# Altium PCB ControlBoard.PcbDoc (part 1 of 2)
Units mil, origin at the board's own origin, x right, y up, seen from the top; angles counter-clockwise.
Board outline 3834.27 x 1968.5 mil, 4 copper layers (TOP, GND, POWER, BOTTOM), stack 23.756 mil thick; 135 components, 144 nets, 798 pads, 277 vias.
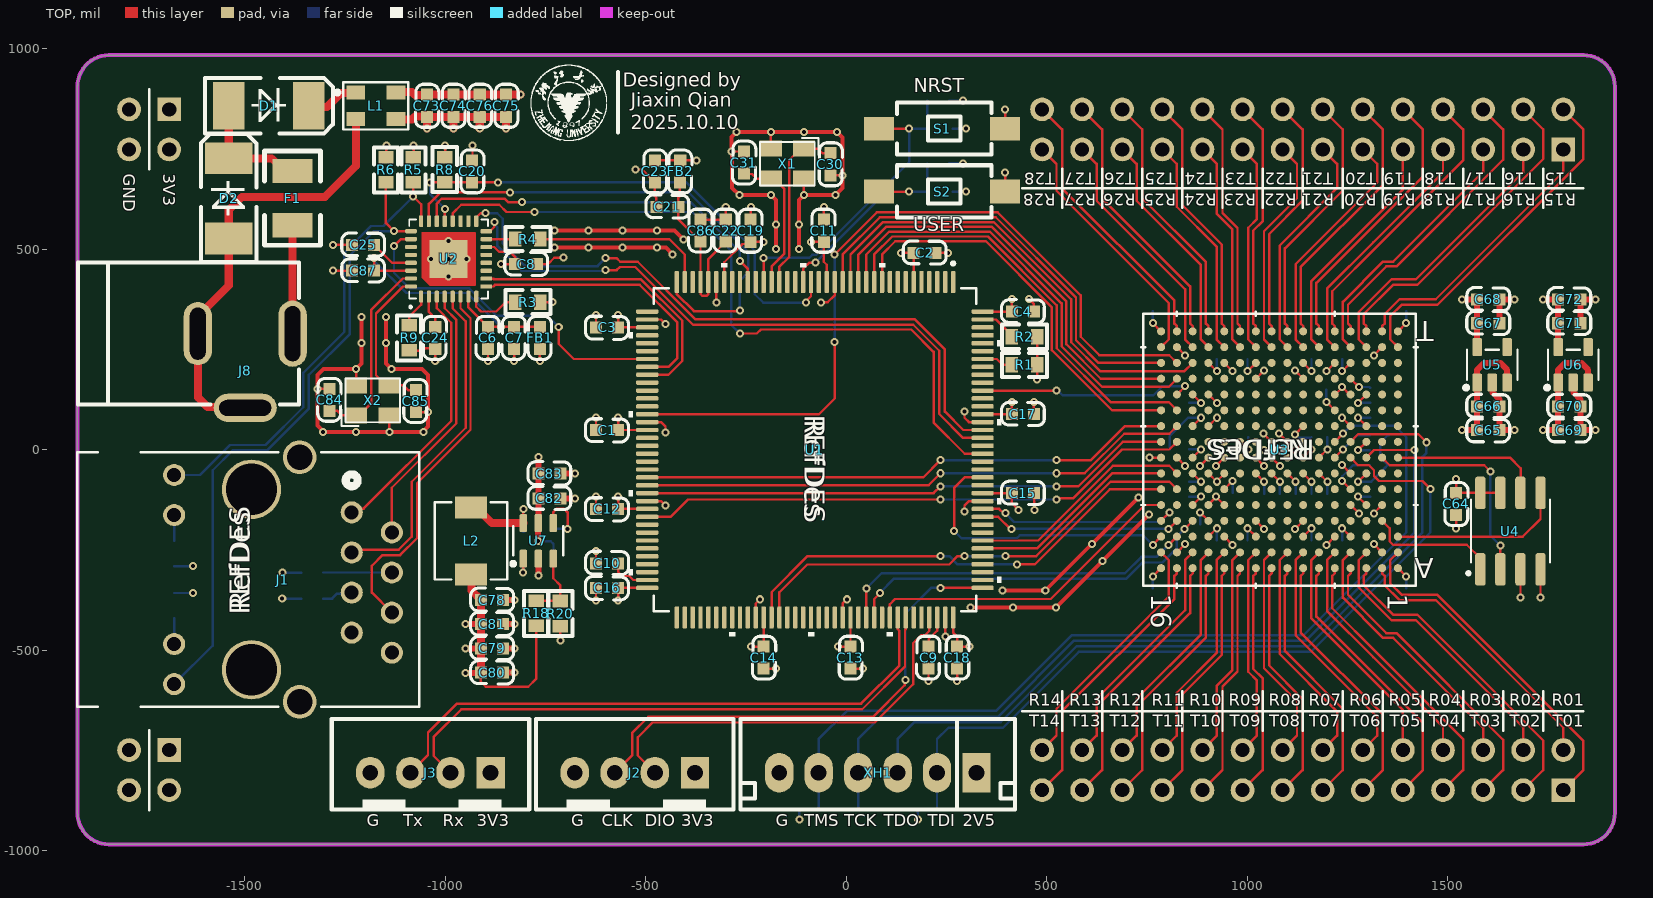
[diagram p0: TOP view]
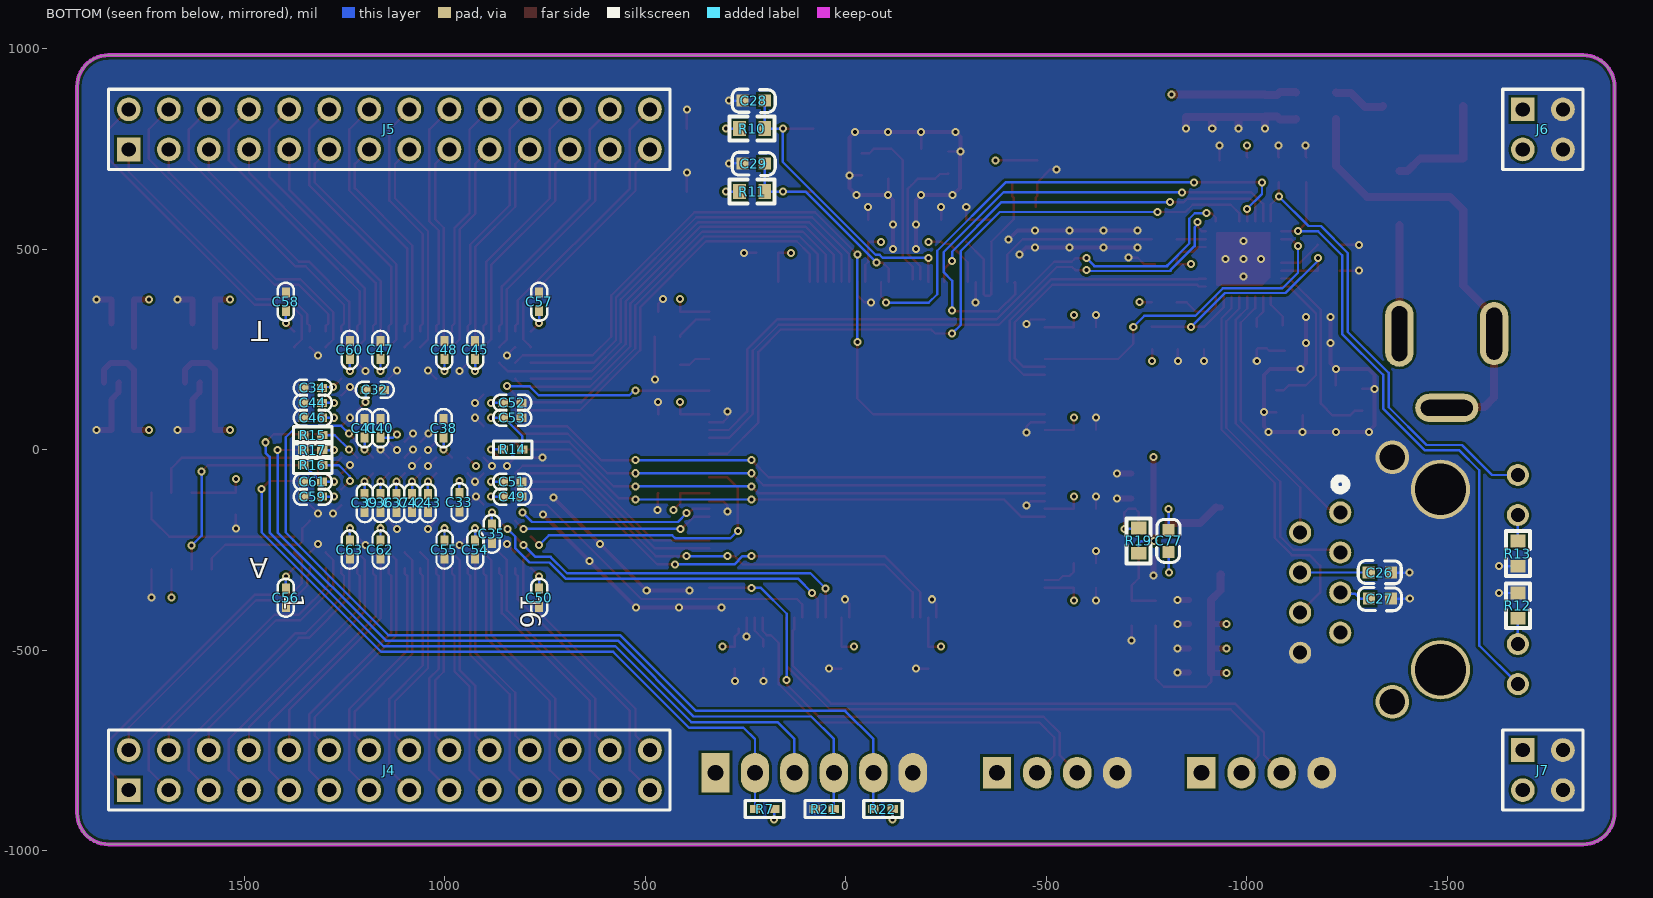
[diagram p1: BOTTOM view, seen from below]
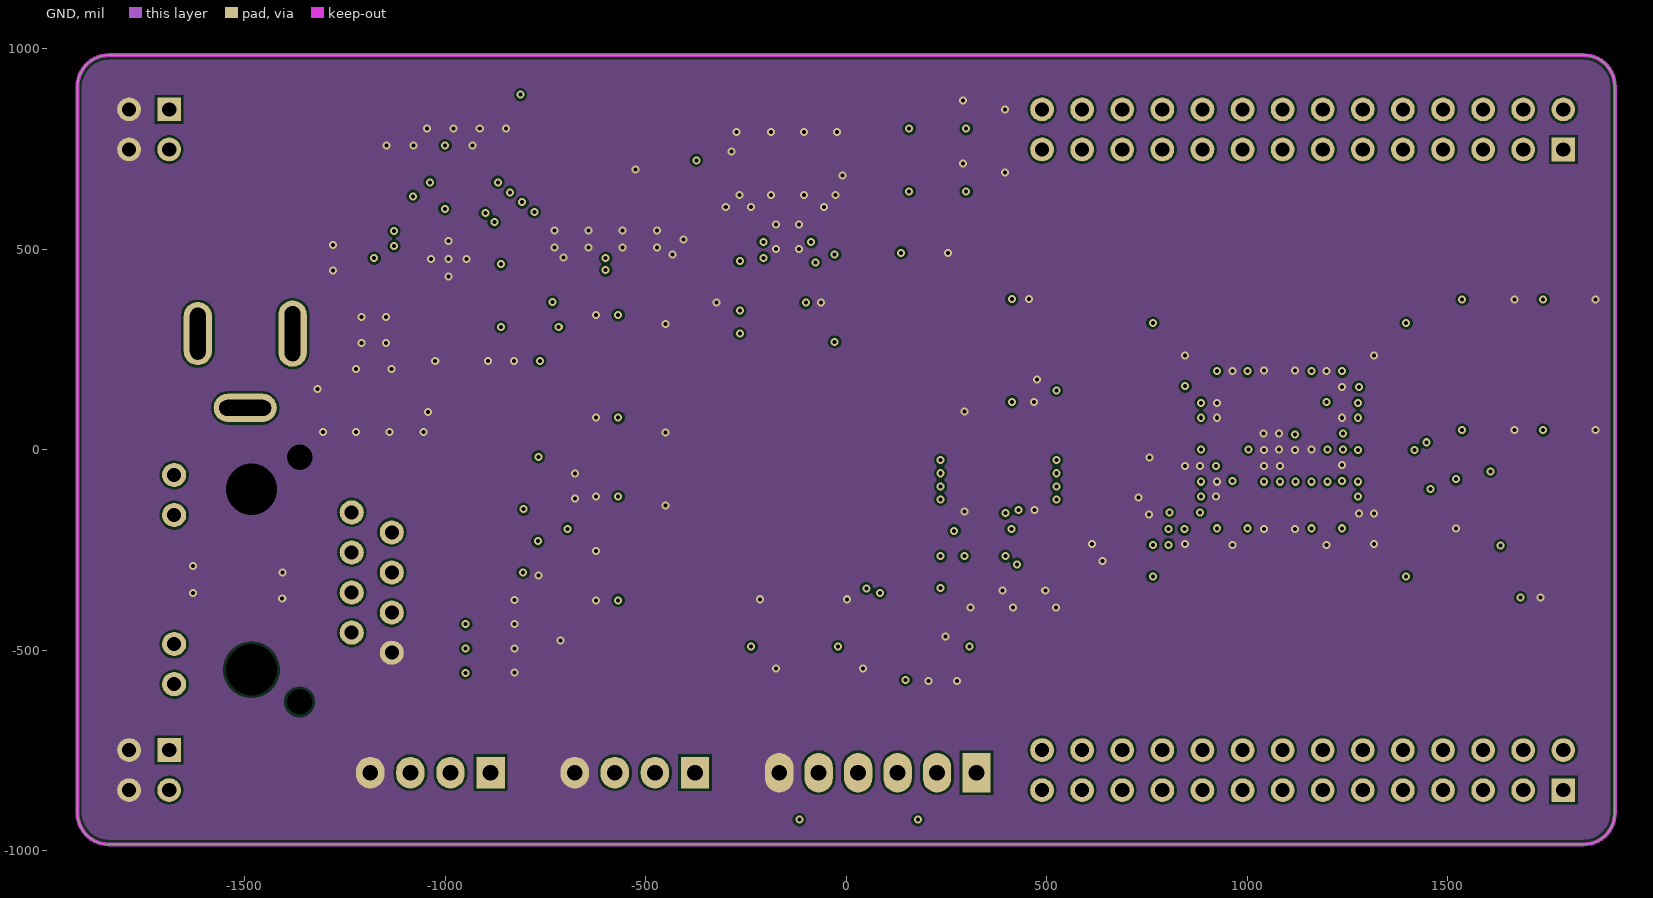
[diagram p2: GND]
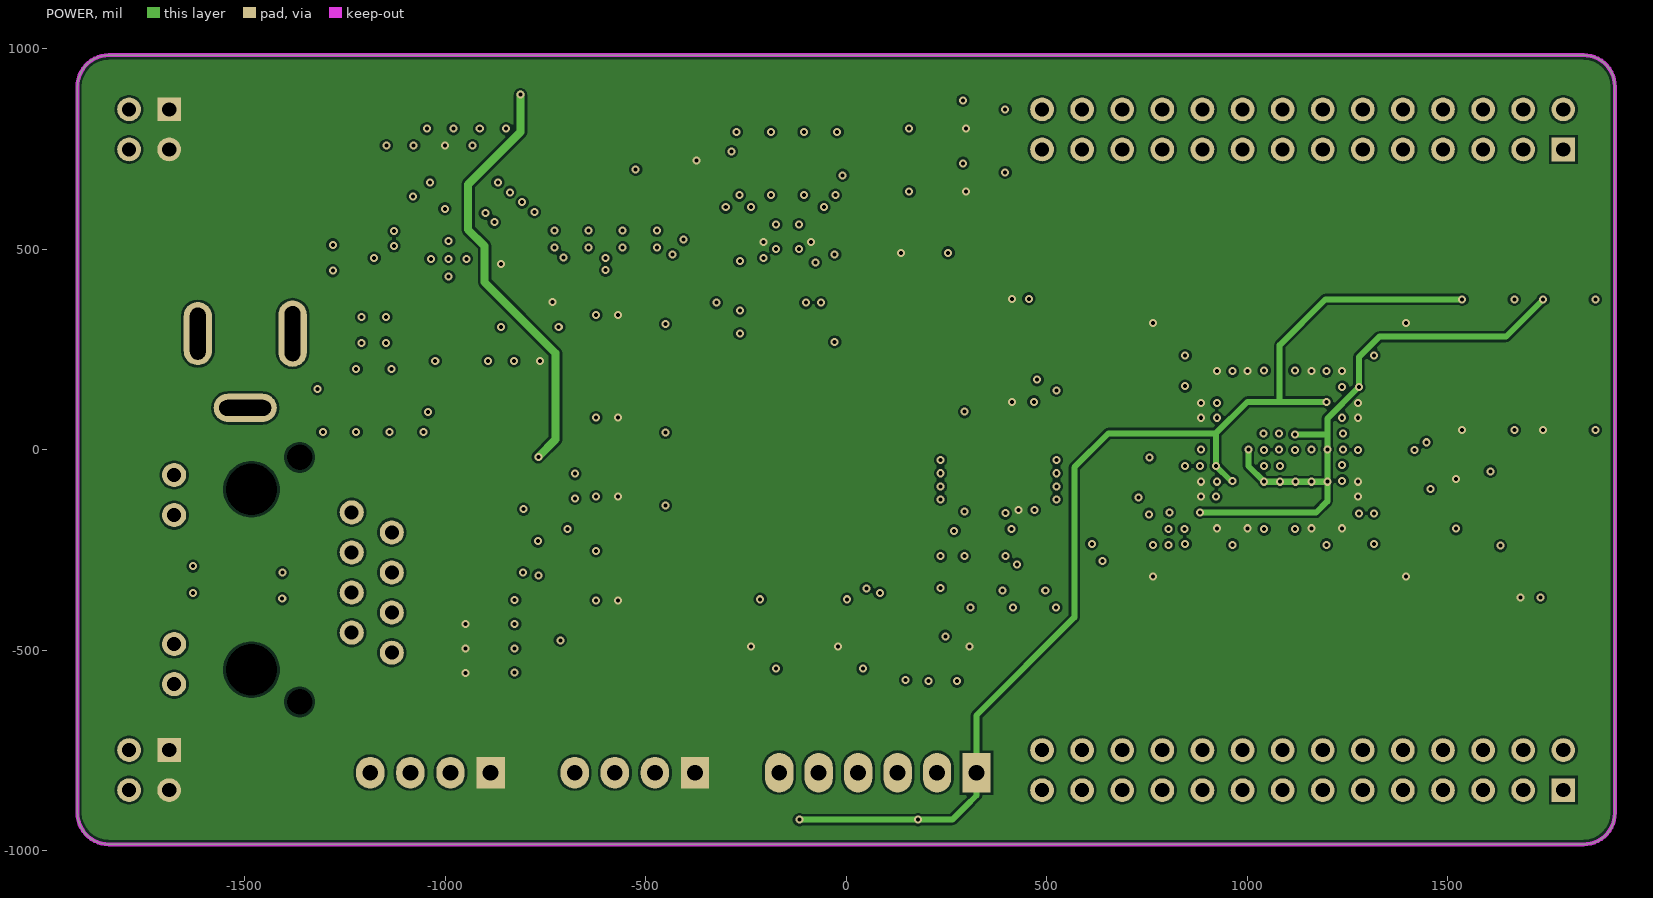
[diagram p3: POWER]

## Layer stack, top to bottom
Top Solder: solder mask 0.4, Solder Resist, Dk 3.5
TOP: signal copper 1.4
Dielectric 2: prepreg 2.8, PP-006, Dk 4.1
GND: signal copper 1.378
Dielectric 1: dielectric 12.6, FR-4, Dk 4.8
POWER: signal copper 1.378
Dielectric 3: prepreg 2.8, PP-006, Dk 4.1
BOTTOM: signal copper 1.4
Bottom Solder: solder mask 0.4, Solder Resist, Dk 3.5

## Board outline
-1838.4,-984.25 cw(c-1838.4,-905.51) -1917.14,-905.51 -1917.14,905.51 cw(c-1838.4,905.51) -1838.4,984.25 1838.4,984.25 cw(c1838.4,905.51) 1917.14,905.51 1917.14,-905.51 cw(c1838.4,-905.51) 1838.4,-984.25

## Design rules (kind name [scope] priority, off if disabled: settings)
Clearance [All] p1: gap=6 ignorepadtopadclearanceinfootprint=FALSE
DiffPairsRouting [All] p1: maxlimit=10 minlimit=8 mostfreqgap=8 toplayer_minwidth=6 toplayer_maxwidth=6 toplayer_prefwidth=6 midlayer1_minwidth=6 midlayer1_maxwidth=6 midlayer1_prefwidth=6 midlayer2_minwidth=6 midlayer2_maxwidth=6 midlayer2_prefwidth=6 bottomlayer_minwidth=6 bottomlayer_maxwidth=6 bottomlayer_prefwidth=6 maxuncoupledlength=500
PolygonConnect [All] p1: connectstyle=Direct reliefconductorwidth=10 reliefentries=4 polygonreliefangle="90 Angle" airgapwidth=10
RoutingVias [All] p1: holewidth=28 width=50 viastyle="Through Hole" minholewidth=28 minwidth=50 maxholewidth=28 maxwidth=50
SilkToSolderMaskClearance [IsPad] p1: minsilkscreentomaskgap=6 clearancetoexposedcopper=TRUE
SolderMaskExpansion [All] p1: expansion=4 istentingtop=FALSE
SupplyNets "Schematic Supply Nets_5" [InNet('3V3')] p1: voltage=0.000
SupplyNets "Schematic Supply Nets_4" [InNet('GND')] p2: voltage=0.000
SupplyNets "Schematic Supply Nets_3" [InNet('A3V3')] p3: voltage=0.000
SupplyNets "Schematic Supply Nets_2" [InNet('2V5')] p4: voltage=0.000
SupplyNets "Schematic Supply Nets_1" [InNet('12V')] p5: voltage=0.000
SupplyNets "Schematic Supply Nets" [InNet('1V2')] p6: voltage=0.000
Width [All] p1: maxlimit=20 minlimit=6 preferedwidth=6
28 further rules are at their usual default settings.

## Classes and differential pairs
net class FPGA_FSMC_DATA[7..0]: FPGA_FSMC_DATA0 FPGA_FSMC_DATA1 FPGA_FSMC_DATA2 FPGA_FSMC_DATA3 FPGA_FSMC_DATA4 FPGA_FSMC_DATA5 FPGA_FSMC_DATA6 FPGA_FSMC_DATA7
net class FPGA_FSMC_ADDR[6..0]: FPGA_FSMC_ADDR0 FPGA_FSMC_ADDR1 FPGA_FSMC_ADDR2 FPGA_FSMC_ADDR3 FPGA_FSMC_ADDR4 FPGA_FSMC_ADDR5 FPGA_FSMC_ADDR6
component class POWER: C73 C74 C75 C76 C77 C78 C79 C80 C81 C82 C83 D1 D2 F1 J8 L1 L2 R18 R19 R20 U7
component class MCU: C1 C2 C3 C4 C6 C7 C8 C9 C10 C11 C12 C13 C14 C15 C16 C17 C18 C19 C20 C21 C22 C23 C24 C25 C26 C27 C28 C29 C30 C31 C84 C85 C86 C87 FB1 FB2 J1 J2 J3 R1 R2 R3 R4 R5 R6 R8 R9 R10 R11 R12 R13 S1 S2 U1 U2 X1 X2
component class FPGA: C32 C33 C34 C35 C36 C37 C38 C39 C40 C41 C42 C43 C44 C45 C46 C47 C48 C49 C50 C51 C52 C53 C54 C55 C56 C57 C58 C59 C60 C61 C62 C63 C64 C65 C66 C67 C68 C69 C70 C71 C72 J4 J5 J6 J7 R7 R14 R15 R16 R17 R21 R22 U3 U4 U5 U6 XH1

## Components (designator, comment, footprint, x,y, rotation, side; value= is the part's Value field where it differs from the comment)
C1 "100nF/100V" 0603C -624.08,49.57 r0 top
C2 "100nF/100V" 0603C 223.41,490.65 r180 top
C3 "100nF/100V" 0603C -624.08,305.47 r0 top
C4 "100nF/100V" 0603C 468.35,344.13 r180 top
C6 "100nF/100V" 0603C -893.04,306.47 r270 top
C7 "10uF/25V" 0603C -827.9,306.47 r270 top
C8 "100nF/100V" 0603C -770.34,462.59 r180 top
C9 "2.2uF/50V" 0603C 205.63,-490.85 r270 top
C10 "2.2uF/50V" 0603C -568.71,-283.5 r180 top
C11 "100nF/100V" 0603C -55.51,573.86 r270 top
C12 "100nF/100V" 0603C -624.08,-147.28 r0 top
C13 "100nF/100V" 0603C 10.37,-546.21 r90 top
C14 "100nF/100V" 0603C -206.17,-546.21 r90 top
C15 "100nF/100V" 0603C 468.35,-108.62 r180 top
C16 "100nF/100V" 0603C -624.08,-344.13 r0 top
C17 "100nF/100V" 0603C 468.35,88.23 r180 top
C18 "100nF/100V" 0603C 276.27,-546.21 r90 top
C19 "100nF/100V" 0603C -237.86,573.86 r270 top
C20 "100nF/100V" 0603C -933.22,666.54 r90 top
C21 "10uF/25V" 0603C -418.41,605.5 r180 top
C22 "100nF/100V" 0603C -300.01,574.07 r270 top
C23 "100nF/100V" 0603C -477.69,666.54 r90 top
C24 "100nF/100V" 0603C -1024.51,306.47 r270 top
C25 "100nF/100V" 0603C -1176.93,510.59 r180 top
C26 "100nF/100V" 0603C -1359.37,-306.5 r0 bottom
C27 "100nF/100V" 0603C -1304.22,-371.14 r180 bottom
C28 "100nF/100V" 0603C 257.35,871.21 r180 bottom
C29 "100nF/100V" 0603C 257.35,714.21 r180 bottom
C30 "16pF/50V" 0603C -39.69,684.27 r90 top
C31 "16pF/50V" 0603C -255.58,688.54 r90 top
C32 "100nF/50V" 0402C 1149.73,149.32 r0 bottom
C33 "100nF/50V" 0402C 963.46,-155.69 r90 bottom
C34 "100nF/50V" 0402C 1354.47,154.16 r180 bottom
C35 "100nF/50V" 0402C 882.61,-234.43 r90 bottom
C36 "100nF/50V" 0402C 1160.31,-157.8 r90 bottom
C37 "100nF/50V" 0402C 1120.94,-157.8 r90 bottom
C38 "100nF/50V" 0402C 1003.14,79.05 r270 bottom
C39 "100nF/50V" 0402C 1199.68,-157.8 r90 bottom
C40 "100nF/50V" 0402C 1160.62,79.05 r270 bottom
C41 "100nF/50V" 0402C 1199.99,79.05 r270 bottom
C42 "100nF/50V" 0402C 1081.57,-157.8 r90 bottom
C43 "100nF/50V" 0402C 1042.2,-157.8 r90 bottom
C44 "100nF/50V" 0402C 1354.47,116.9 r180 bottom
C45 "100nF/50V" 0402C 924.4,273.8 r270 bottom
C46 "100nF/50V" 0402C 1354.47,79.64 r180 bottom
C47 "100nF/50V" 0402C 1160.62,273.8 r270 bottom
C48 "100nF/50V" 0402C 1001.03,273.8 r270 bottom
C49 "100nF/50V" 0402C 806.88,-116.9 r0 bottom
C50 "100nF/50V" 0402C 764.5,-394.02 r90 bottom
C51 "100nF/50V" 0402C 806.88,-79.64 r0 bottom
C52 "100nF/50V" 0402C 806.88,117.21 r0 bottom
C53 "100nF/50V" 0402C 806.88,79.95 r0 bottom
C54 "100nF/50V" 0402C 924.09,-273.8 r90 bottom
C55 "100nF/50V" 0402C 1000.72,-273.8 r90 bottom
C56 "100nF/50V" 0402C 1396.53,-394.02 r90 bottom
C57 "100nF/50V" 0402C 764.81,394.02 r270 bottom
C58 "100nF/50V" 0402C 1396.85,394.02 r270 bottom
C59 "100nF/50V" 0402C 1354.47,-117.21 r180 bottom
C60 "100nF/50V" 0402C 1237.25,273.8 r270 bottom
C61 "100nF/50V" 0402C 1354.47,-79.95 r180 bottom
C62 "100nF/50V" 0402C 1160.31,-273.8 r90 bottom
C63 "100nF/50V" 0402C 1236.94,-273.8 r90 bottom
C64 "100nF/100V" 0603C 1520.65,-162.82 r90 top
C65 "10uF/25V" 0603C 1573.52,49.31 r0 top
C66 "100nF/100V" 0603C 1628.95,107.91 r180 top
C67 "100nF/100V" 0603C 1628.95,315.1 r180 top
C68 "1uF/50V" 0603C 1628.95,374.41 r180 top
C69 "10uF/25V" 0603C 1775.52,49.31 r0 top
C70 "100nF/100V" 0603C 1830.95,107.91 r180 top
C71 "100nF/100V" 0603C 1830.95,315.1 r180 top
C72 "1uF/50V" 0603C 1830.95,374.41 r180 top
C73 "10uF/25V" 0603C -1046.22,830.18 r90 top
C74 "10uF/25V" 0603C -980.22,830.18 r90 top
C75 "10uF/25V" 0603C -848.22,830.18 r90 top
C76 "10uF/25V" 0603C -914.22,830.18 r90 top
C77 "100nF/100V" 0603C -805.62,-199.61 r270 bottom
C78 "100nF/100V" 0603C -855.32,-375.13 r180 top
C79 "10uF/25V" 0603C -855.32,-495.87 r180 top
C80 "10uF/25V" 0603C -855.32,-556.24 r180 top
C81 "10uF/25V" 0603C -855.32,-435.5 r180 top
C82 "100nF/100V" 0603C -712.65,-121.65 r180 top
C83 "10uF/25V" 0603C -712.65,-59.94 r180 top
C84 "16pF/50V" 0603C -1287.73,152.27 r270 top
C85 "16pF/50V" 0603C -1072.87,149.04 r270 top
C86 "100nF/100V" 0603C -362.51,574.07 r270 top
C87 "100nF/100V" 0603C -1176.93,446.17 r180 top
D1 "SSA34" SMA/DO-214AC -1534.86,857.86 r0 top
D2 "SMAJ12CA" SMA/DO-214AC -1539.86,531.89 r90 top
F1 "JK-SMD1210-050-30V" FUSE-1210 -1378.64,561.86 r90 top
FB1 "200R,1A" 0603 -762.77,306.47 r270 top
FB2 "200R,1A" 0603 -415.19,666.54 r90 top
J1 "RJ45" 1105A_HAN -1233.15,-156.14 r90 top
J2 "XH4" XH4/2.54mm/180 -377,-805.28 r180 top
J3 "XH4" XH4/2.54mm/180 -886.86,-805.28 r180 top
J4 "Pin HDR2X14" "Pin HDR2X14/2.54mm-S" 1788.4,-848.86 r180 bottom
J5 "Pin HDR2X14" "Pin HDR2X14/2.54mm-S" 1788.4,748.86 r180 bottom
J6 "Pin HDR2X2" "Pin HDR2X2/2.54mm-S" -1688.4,848.86 r270 bottom
J7 "Pin HDR2X2" "Pin HDR2X2/2.54mm-S" -1688.4,-748.86 r270 bottom
J8 "DC-005-5A-2.0" DC-IN-TH_DC-005-5A-2.0 -1498.75,197 r0 top
L1 "SMW3225S102HTE" INDDFN4_320X250X240L65X80N -1172.86,857.86 r0 top value=10uH
L2 "4.7uH" L0420 -935.49,-227.29 r270 top value=10uH
R1 "4.7kR, 1%" 0603R 476.13,211.86 r180 top
R2 "4.7kR, 1%" 0603R 476.13,281.86 r180 top
R3 "4.7kR, 1%" 0603R -762.56,367.95 r180 top
R4 "22R, 1%" 0603R -762.56,525.27 r180 top
R5 "4.7kR, 1%" 0603R -1079.51,666.75 r90 top
R6 "4.7kR, 1%" 0603R -1147.83,666.75 r90 top
R7 "2kR, 1%" 0402R 178.56,-896 r0 bottom
R8 "4.7kR, 1%" 0603R -1001.19,729.74 r270 top
R9 "2.49kR, 1%" 0603R -1089.86,247.79 r90 top
R10 "10kR, 1%" 0603R 265.13,800.86 r180 bottom
R11 "10kR, 1%" 0603R 265.13,643.86 r180 bottom
R12 "510R, 1%" 0603R -1676.07,-420.14 r90 bottom
R13 "510R, 1%" 0603R -1676.07,-227.42 r270 bottom
R14 "10kR, 1%" 0402R 806.88,1.05 r0 bottom
R15 "10kR, 1%" 0402R 1353.47,36.2 r180 bottom
R16 "10kR, 1%" 0402R 1353.47,-38.31 r180 bottom
R17 "10kR, 1%" 0402R 1353.47,-1.06 r180 bottom
R18 "100kR, 1%" 0603R -773.23,-439.14 r90 top
R19 "100kR, 1%" 0603R -730.46,-258.29 r90 bottom
R20 "22kR, 1%" 0603R -712.86,-377.14 r270 top
R21 "2kR, 1%" 0402R 77.71,-896 r180 bottom
R22 "2kR, 1%" 0402R -116.71,-896 r0 bottom
S1 "Key" SW-SMD 239.14,800.86 r180 top
S2 "Key" SW-SMD 239.14,643.86 r180 top
U1 "STM32F407ZET6" LQFP144-20X20MM -77.86,0 r270 top locked
U2 "YT8512C" QFN32 -991.34,476.06 r0 top
U3 "EP4CE10F17C8N" FBGA256 1080.67,0 r180 top locked
U4 "W25Q16JVSNIQ" SOIC8 1656.61,-203 r0 top
U5 "TPRT9013-25GB" SOT23-5 1611.14,211.86 r0 top
U6 "TPRT9013-12GB" SOT23-5 1813.14,211.86 r0 top
U7 "FDK1620YSOT236G/TR" SOT23-6 -767.86,-227.29 r0 top
X1 "X322525MOB4SI" SMD3225-4 -146.76,713.6 r180 top
X2 "X322525MOB4SI" SMD3225-4 -1180.66,122.95 r0 top
XH1 "XH6" XH6/2.54mm/180 324.99,-805.28 r180 top

## Footprints (in the part's own frame and the unit in brackets; to place one, negate y for a bottom-side part, rotate by r counter-clockwise, add the part's x,y. Pads: shape width x height; smd on the part's side, far side on the other; paste and mask are expansions set on the pad)
0402C [mil]
  rect 25x20 smd: 1(2,0.16) 2(48,0.16)
  silkscreen extent -23,-20 73,20, body extent 5,-12 45,12, height 8
0402R [mil]
  rect 26x20 smd: 1(0,0) 2(48,0)
  silkscreen extent -24,-21 72,21, body extent 4,-10 43,10, height 13
0603 [mil]
  rect 30x30 smd: 1(0.21,-0.35) 2(55.21,-1.35)
  silkscreen extent -26,-30 81,28, body extent -1,-15 62,17, height 12
0603C [mil]
  rect 30x30 smd: 1(0.21,-0.35) 2(55.21,-0.35)
  silkscreen extent -26,-30 81,28, body extent -1,-16 61,15, height 12
0603R [mm]
  rect 0.8x0.965 smd: 1(0,0) 2(1.6,0)
  silkscreen extent -0.63,-0.76 2.21,0.76, body extent -0.04,-0.41 1.56,0.41, height 0.45
1105A_HAN [mil]
  round 55 / inner round 60 / far side round 55 hole 35 paste-99999 mask+0: 1(0,0) 2(-50,-100) 3(-100,0) 4(-150,-100) 5(-200,0) 6(-250,-100) 7(-300,0) 8(-350,-100) 9(93.19,442.91) 10(-6.81,442.91) 11(-328.46,442.91) 12(-428.46,442.91)
  round 84 / inner round 60 / far side round 84 hole 64 paste-99999: 13(137.28,129.92) 16(-472.56,129.92)
  round 148 / inner round 60 / far side round 148 hole 128 paste-99999: 14(57.36,250) 15(-392.64,250)
  silkscreen extent -485,-168 150,685, body extent -484,-169 146,682, height 549
DC-IN-TH_DC-005-5A-2.0 [mm]
  oval 1.8x4.2 hole 1 slot 3.5 at 90 deg: 1(3,2.352)
  oval 1.8x4 hole 1 slot 3.3 at 90 deg: 2(-3,2.352)
  oval 4x1.8 hole 1 slot 3.3 at 0 deg: 3(0,-2.352)
  silkscreen extent -10.6,-2.15 3.4,6.85, body extent -10.7,-2.54 3.3,6.86, height 11.1
FBGA256 [mil]
  round 20 smd paste+0 mask+0: A1(-295.28,295.28) A2(-255.91,295.28) A3(-216.54,295.28) A4(-177.17,295.28) A5(-137.8,295.28) A6(-98.43,295.28) A7(-59.06,295.28) A8(-19.69,295.28) A9(19.68,295.28) A10(59.06,295.28) A11(98.43,295.28) A12(137.8,295.28) A13(177.17,295.28) A14(216.54,295.28) A15(255.91,295.28) A16(295.28,295.28) B1(-295.28,255.91) B2(-255.91,255.91) B3(-216.54,255.91) B4(-177.17,255.91) B5(-137.8,255.91) B6(-98.43,255.91) B7(-59.06,255.91) B8(-19.69,255.91) B9(19.68,255.91) B10(59.05,255.91) B11(98.43,255.91) B12(137.8,255.91) B13(177.17,255.91) B14(216.54,255.91) B15(255.91,255.91) B16(295.28,255.91) C1(-295.28,216.54) C2(-255.91,216.54) C3(-216.54,216.54) C4(-177.17,216.54) C5(-137.8,216.54) C6(-98.43,216.54) C7(-59.06,216.54) C8(-19.69,216.54) C9(19.68,216.54) C10(59.05,216.54) C11(98.43,216.54) C12(137.8,216.54) C13(177.17,216.54) C14(216.54,216.54) C15(255.91,216.54) C16(295.28,216.54) D1(-295.28,177.17) D2(-255.91,177.17) D3(-216.54,177.17) D4(-177.17,177.17) D5(-137.8,177.17) D6(-98.43,177.17) D7(-59.06,177.17) D8(-19.68,177.17) D9(19.69,177.17) D10(59.06,177.17) D11(98.43,177.17) D12(137.8,177.17) D13(177.17,177.17) D14(216.54,177.17) D15(255.91,177.17) D16(295.28,177.17) E1(-295.28,137.8) E2(-255.91,137.8) E3(-216.54,137.8) E4(-177.17,137.8) E5(-137.8,137.8) E6(-98.43,137.8) E7(-59.06,137.8) E8(-19.69,137.8) E9(19.68,137.8) E10(59.06,137.8) E11(98.43,137.8) E12(137.8,137.8) E13(177.17,137.8) E14(216.54,137.8) E15(255.91,137.8) E16(295.28,137.8) F1(-295.28,98.43) F2(-255.91,98.43) F3(-216.54,98.43) F4(-177.17,98.43) F5(-137.8,98.43) F6(-98.43,98.43) F7(-59.06,98.43) F8(-19.69,98.43) F9(19.68,98.43) F10(59.06,98.43) F11(98.43,98.43) F12(137.8,98.43) F13(177.17,98.43) F14(216.54,98.43) F15(255.91,98.43) F16(295.28,98.43) G1(-295.28,59.06) G2(-255.91,59.06) G3(-216.54,59.06) G4(-177.17,59.06) G5(-137.8,59.06) G6(-98.43,59.06) G7(-59.06,59.06) G8(-19.68,59.06) G9(19.68,59.06) G10(59.06,59.06) G11(98.43,59.06) G12(137.8,59.06) G13(177.17,59.06) G14(216.54,59.06) G15(255.91,59.06) G16(295.28,59.06) H1(-295.28,19.69) H2(-255.91,19.69) H3(-216.54,19.69) H4(-177.17,19.69) H5(-137.8,19.69) H6(-98.43,19.69) H7(-59.06,19.69) H8(-19.69,19.69) H9(19.68,19.69) H10(59.06,19.69) H11(98.43,19.69) H12(137.8,19.69) H13(177.17,19.69) H14(216.54,19.69) H15(255.91,19.69) H16(295.28,19.69) J1(-295.28,-19.68) J2(-255.91,-19.68) J3(-216.54,-19.69) J4(-177.17,-19.68) J5(-137.8,-19.68) J6(-98.43,-19.69) J7(-59.06,-19.68) J8(-19.69,-19.68) J9(19.68,-19.68) J10(59.05,-19.68) J11(98.43,-19.68) J12(137.8,-19.68) J13(177.17,-19.68) J14(216.54,-19.68) J15(255.91,-19.68) J16(295.28,-19.69) K1(-295.28,-59.06) K2(-255.91,-59.06) K3(-216.54,-59.06) K4(-177.17,-59.06) K5(-137.8,-59.06) K6(-98.43,-59.06) K7(-59.06,-59.06) K8(-19.69,-59.06) K9(19.68,-59.06) K10(59.06,-59.06) K11(98.43,-59.06) K12(137.8,-59.06) K13(177.17,-59.06) K14(216.54,-59.06) K15(255.91,-59.06) K16(295.28,-59.06) L1(-295.28,-98.43) L2(-255.91,-98.43) L3(-216.54,-98.43) L4(-177.17,-98.43) L5(-137.8,-98.43) L6(-98.43,-98.43) L7(-59.06,-98.43) L8(-19.69,-98.43) L9(19.68,-98.43) L10(59.06,-98.43) L11(98.43,-98.43) L12(137.8,-98.43) L13(177.17,-98.43) L14(216.54,-98.43) L15(255.91,-98.43) L16(295.28,-98.43) M1(-295.28,-137.8) M2(-255.91,-137.8) M3(-216.54,-137.8) M4(-177.17,-137.8) M5(-137.8,-137.8) M6(-98.43,-137.8) M7(-59.06,-137.8) M8(-19.69,-137.8) M9(19.68,-137.8) M10(59.05,-137.8) M11(98.43,-137.8) M12(137.8,-137.8) M13(177.17,-137.8) M14(216.54,-137.8) M15(255.91,-137.8) M16(295.28,-137.8) N1(-295.28,-177.17) N2(-255.91,-177.17) N3(-216.54,-177.17) N4(-177.17,-177.17) N5(-137.8,-177.17) N6(-98.43,-177.17) N7(-59.06,-177.17) N8(-19.69,-177.17) N9(19.68,-177.17) N10(59.05,-177.17) N11(98.43,-177.17) N12(137.8,-177.17) N13(177.17,-177.17) N14(216.54,-177.17) N15(255.91,-177.17) N16(295.28,-177.17) P1(-295.28,-216.54) P2(-255.91,-216.54) P3(-216.54,-216.54) P4(-177.17,-216.54) P5(-137.8,-216.54) P6(-98.43,-216.54) P7(-59.06,-216.54) P8(-19.69,-216.54) P9(19.69,-216.54) P10(59.06,-216.54) P11(98.43,-216.54) P12(137.8,-216.54) P13(177.17,-216.54) P14(216.54,-216.54) P15(255.91,-216.54) P16(295.28,-216.54) R1(-295.28,-255.91) R2(-255.91,-255.91) R3(-216.54,-255.91) R4(-177.17,-255.91) R5(-137.8,-255.91) R6(-98.43,-255.91) R7(-59.06,-255.91) R8(-19.69,-255.91) R9(19.68,-255.91) R10(59.06,-255.91) R11(98.43,-255.91) R12(137.8,-255.91) R13(177.17,-255.91) R14(216.54,-255.91) R15(255.91,-255.91) R16(295.28,-255.91) T1(-295.28,-295.28) T2(-255.91,-295.28) T3(-216.54,-295.28) T4(-177.17,-295.28) T5(-137.8,-295.28) T6(-98.43,-295.28) T7(-59.06,-295.28) T8(-19.69,-295.28) T9(19.68,-295.28) T10(59.05,-295.28) T11(98.43,-295.28) T12(137.8,-295.28) T13(177.17,-295.28) T14(216.54,-295.28) T15(255.91,-295.28) T16(295.28,-295.28)
  silkscreen extent -344,-344 345,344, body extent -334,-334 334,334, height 61
FUSE-1210 [mil]
  rect 60x100 smd: 1(-2,2) 2(133,2)
  silkscreen extent -52,-68 183,72, body extent 8,-49 134,53, height 27
INDDFN4_320X250X240L65X80N [mm] "Inductor, Dual Flat No-Lead (DFN) 4 pins, 2.55 mm pitch; 3.20 mm L X 2.50 mm W X 2.40 mm H body"
  rect 1.2x0.87 smd: 1(-1.275,0.841) 2(-1.275,-0.841) 3(1.275,-0.841) 4(1.275,0.841)
  silkscreen extent -2.56,-1.5 2.06,1.5, body extent -1.6,-1.25 1.6,1.25, height 2.4
L0420 [mm] "Inductor, Dual Flat No-Lead (DFN) 2 pins; 4.40 mm L X 4.20 mm W X 1.80 mm H body"
  rect 1.4x2.03 smd: 1(-2.125,0) 2(2.125,0)
  silkscreen extent -2.45,-2.3 2.45,2.3, body extent -2.52,-2.1 2.52,2.1, height 1.8
LQFP144-20X20MM [mm]
  rrect50% 1.4x0.28 smd: 1(-10.625,8.75) 2(-10.625,8.25) 3(-10.625,7.75) 4(-10.625,7.25) 5(-10.625,6.75) 6(-10.625,6.25) 7(-10.625,5.75) 8(-10.625,5.25) 9(-10.625,4.75) 10(-10.625,4.25) 11(-10.625,3.75) 12(-10.625,3.25) 13(-10.625,2.75) 14(-10.625,2.25) 15(-10.625,1.75) 16(-10.625,1.25) 17(-10.625,0.75) 18(-10.625,0.25) 19(-10.625,-0.25) 20(-10.625,-0.75) 21(-10.625,-1.25) 22(-10.625,-1.75) 23(-10.625,-2.25) 24(-10.625,-2.75) 25(-10.625,-3.25) 26(-10.625,-3.75) 27(-10.625,-4.25) 28(-10.625,-4.75) 29(-10.625,-5.25) 30(-10.625,-5.75) 31(-10.625,-6.25) 32(-10.625,-6.75) 33(-10.625,-7.25) 34(-10.625,-7.75) 35(-10.625,-8.25) 36(-10.625,-8.75) 73(10.625,-8.75) 74(10.625,-8.25) 75(10.625,-7.75) 76(10.625,-7.25) 77(10.625,-6.75) 78(10.625,-6.25) 79(10.625,-5.75) 80(10.625,-5.25) 81(10.625,-4.75) 82(10.625,-4.25) 83(10.625,-3.75) 84(10.625,-3.25) 85(10.625,-2.75) 86(10.625,-2.25) 87(10.625,-1.75) 88(10.625,-1.25) 89(10.625,-0.75) 90(10.625,-0.25) 91(10.625,0.25) 92(10.625,0.75) 93(10.625,1.25) 94(10.625,1.75) 95(10.625,2.25) 96(10.625,2.75) 97(10.625,3.25) 98(10.625,3.75) 99(10.625,4.25) 100(10.625,4.75) 101(10.625,5.25) 102(10.625,5.75) 103(10.625,6.25) 104(10.625,6.75) 105(10.625,7.25) 106(10.625,7.75) 107(10.625,8.25) 108(10.625,8.75)
  rrect50% 0.28x1.4 smd: 37(-8.75,-10.625) 38(-8.25,-10.625) 39(-7.75,-10.625) 40(-7.25,-10.625) 41(-6.75,-10.625) 42(-6.25,-10.625) 43(-5.75,-10.625) 44(-5.25,-10.625) 45(-4.75,-10.625) 46(-4.25,-10.625) 47(-3.75,-10.625) 48(-3.25,-10.625) 49(-2.75,-10.625) 50(-2.25,-10.625) 51(-1.75,-10.625) 52(-1.25,-10.625) 53(-0.75,-10.625) 54(-0.25,-10.625) 55(0.25,-10.625) 56(0.75,-10.625) 57(1.25,-10.625) 58(1.75,-10.625) 59(2.25,-10.625) 60(2.75,-10.625) 61(3.25,-10.625) 62(3.75,-10.625) 63(4.25,-10.625) 64(4.75,-10.625) 65(5.25,-10.625) 66(5.75,-10.625) 67(6.25,-10.625) 68(6.75,-10.625) 69(7.25,-10.625) 70(7.75,-10.625) 71(8.25,-10.625) 72(8.75,-10.625) 109(8.75,10.625) 110(8.25,10.625) 111(7.75,10.625) 112(7.25,10.625) 113(6.75,10.625) 114(6.25,10.625) 115(5.75,10.625) 116(5.25,10.625) 117(4.75,10.625) 118(4.25,10.625) 119(3.75,10.625) 120(3.25,10.625) 121(2.75,10.625) 122(2.25,10.625) 123(1.75,10.625) 124(1.25,10.625) 125(0.75,10.625) 126(0.25,10.625) 127(-0.25,10.625) 128(-0.75,10.625) 129(-1.25,10.625) 130(-1.75,10.625) 131(-2.25,10.625) 132(-2.75,10.625) 133(-3.25,10.625) 134(-3.75,10.625) 135(-4.25,10.625) 136(-4.75,10.625) 137(-5.25,10.625) 138(-5.75,10.625) 139(-6.25,10.625) 140(-6.75,10.625) 141(-7.25,10.625) 142(-7.75,10.625) 143(-8.25,10.625) 144(-8.75,10.625)
  silkscreen extent -11.9,-11.81 11.81,11.81, body extent -10.95,-10.95 10.95,10.95, height 1.6
"Pin HDR2X2/2.54mm-S" [mm] "Connector; Header; 2x2 Position"
  rect 1.5x1.5 hole 0.9: 1(0,0)
  round 1.5 hole 0.9: 2(0,2.54) 3(2.54,0) 4(2.54,2.54)
  silkscreen extent -1.27,-1.27 3.81,3.81, body extent -1.27,-1.27 3.81,3.81, height 7.58
"Pin HDR2X14/2.54mm-S" [mm] "Connector; Header; 14x2 Position"
  rect 1.5x1.5 hole 0.9: 1(0,0)
  round 1.5 hole 0.9: 2(0,2.54) 3(2.54,0) 4(2.54,2.54) 5(5.08,0) 6(5.08,2.54) 7(7.62,0) 8(7.62,2.54) 9(10.16,0) 10(10.16,2.54) 11(12.7,0) 12(12.7,2.54) 13(15.24,0) 14(15.24,2.54) 15(17.78,0) 16(17.78,2.54) 17(20.32,0) 18(20.32,2.54) 19(22.86,0) 20(22.86,2.54) 21(25.4,0) 22(25.4,2.54) 23(27.94,0) 24(27.94,2.54) 25(30.48,0) 26(30.48,2.54) 27(33.02,0) 28(33.02,2.54)
  silkscreen extent -1.27,-1.27 34.29,3.81, body extent -1.27,-1.27 34.29,3.81, height 7.58
QFN32 [mm] "Quad Flat No-Lead (QFN) with Thermal Tab, 0.50 mm pitch;  rect., 8 pin X 6 pin, 5.00 mm L X 4.00 mm W X 0.80 mm H body"
  rrect50% 0.27x0.737 smd mask+0.1: 1(-1.75,-2.387) 2(-1.25,-2.387) 3(-0.75,-2.387) 4(-0.25,-2.387) 5(0.25,-2.387) 6(0.75,-2.387) 7(1.25,-2.387) 8(1.75,-2.387) 17(1.75,2.387) 18(1.25,2.387) 19(0.75,2.387) 20(0.25,2.387) 21(-0.25,2.387) 22(-0.75,2.387) 23(-1.25,2.387) 24(-1.75,2.387)
  rrect50% 0.737x0.27 smd mask+0.1: 9(2.387,-1.75) 10(2.387,-1.25) 11(2.387,-0.75) 12(2.387,-0.25) 13(2.387,0.25) 14(2.387,0.75) 15(2.387,1.25) 16(2.387,1.75) 25(-2.387,1.75) 26(-2.387,1.25) 27(-2.387,0.75) 28(-2.387,0.25) 29(-2.387,-0.25) 30(-2.387,-0.75) 31(-2.387,-1.25) 32(-2.387,-1.75)
  rect 2.4x2.4 smd paste-2.4 mask-2.4: 33(0,0)
  TOP region: 1.7,-1.65 1.699,-1.658 1.698,-1.666 1.695,-1.673 1.691,-1.679 1.685,-1.685 1.679,-1.69 1.673,-1.695 1.666,-1.698 1.658,-1.699 -1.2,-1.7 -1.7,-1.2 -1.7,1.65 -1.699,1.658 -1.698,1.666 -1.695,1.673 -1.691,1.679 -1.685,1.685 -1.679,1.691 -1.673,1.695 -1.666,1.698 -1.658,1.699 1.65,1.7 1.658,1.699 1.666,1.698 1.673,1.695 1.679,1.691 1.685,1.685 1.691,1.679 1.695,1.673 1.698,1.666 1.699,1.658 1.7,1.65
  silkscreen extent -2.5,-3.12 2.5,2.5, body extent -2.55,-2.55 2.55,2.55, height 0.75
SMA/DO-214AC [mm] "塑封二极管"
  rect 2x3 smd: A(-0.127,0) K(4.953,0)
  silkscreen extent -1.63,-1.75 6.48,1.75, body extent 0.11,-1.35 4.71,1.35, height 2.4
SMD3225-4 [mm] "Diode, Dual Flat No-Lead, 0.75 mm Pitch, 4 pin; 1.20 mm L X 0.775 mm W X 0.40 mm H body"
  rect 1.4x1 smd: 1(-1.05,-0.95) 2(1.05,-0.95) 3(1.05,0.95) 4(-1.05,0.95)
  silkscreen extent -1.98,-1.62 1.74,1.38, body extent -1.6,-1.25 1.6,1.25, height 0.9
SOIC8 [mil] "Small Outline Pkg (SOP), 0.65 mm pitch; 24 pin, 7.80 mm L X 4.40 mm W X 1.20 mm H body"
  rrect50% 26.06x81.46 smd: 1(-75,-95.39) 2(-25,-95.39) 3(25,-95.39) 4(75,-95.39) 5(75,95.39) 6(25,95.39) 7(-25,95.39) 8(-75,95.39)
  silkscreen extent -109,-109 98,79, body extent -96,-118 96,118, height 63
SOT23-5 [mm] "Small Outline Transistor, SOT-23 Type, 0.95 mm pitch; 5 pin, 2.90 mm L X 1.60 mm W X 1.45 mm H body"
  rrect33% 0.6x1.15 smd: 1(-0.95,-1.125) 2(0,-1.125) 3(0.95,-1.125) 4(0.95,1.125) 5(-0.95,1.125)
  silkscreen extent -1.77,-1.57 1.6,0.95, body extent -1.45,-1.4 1.45,1.4, height 1.45
SOT23-6 [mm] "Small Outline Transistor, SOT-23 Type, 0.95 mm pitch; 6 pin, 2.92 mm L X 1.60 mm W X 1.25 mm H body"
  rrect42% 0.48x1.15 smd: 1(-0.95,-1.125) 2(0,-1.125) 3(0.95,-1.125) 4(0.95,1.125) 5(0,1.125) 6(-0.95,1.125)
  silkscreen extent -1.71,-1.57 1.59,0.92, body extent -1.46,-1.4 1.46,1.4, height 1.25
SW-SMD [mm] "L6.0-W3.3-LS8.0"
  rect 1.9x1.5 smd: 1(-4,0) 2(4,0)
  silkscreen extent -3.14,-1.67 2.86,1.63, body extent -4.01,-1.85 4.01,1.85, height 2.5
XH4/2.54mm/180 [mm]
  rect 1.8x2 hole 1: 1(0,0)
  oval 1.8x2 hole 1: 2(2.54,0) 3(5.08,0) 4(7.62,0)
  silkscreen extent -2.45,-3.4 10.07,2.35, body extent -2.39,-3.3 10.01,2.45, height 7
XH6/2.54mm/180 [mm]
  rect 1.8x2.5 hole 1: 1(0,0)
  oval 1.8x2.5 hole 1: 2(2.5,0) 3(5,0) 4(7.5,0) 5(10,0) 6(12.5,0)
  silkscreen extent -2.45,-3.4 14.95,2.35, body extent -2.45,-3.4 14.95,2.35, height 7

## Part data
C1 C2 C3 C4 C6 C8 C11 C12 C13 C14 C15 C16 C17 C18 C19 C20 C22 C23 C24 C25 C26 C27 C28 C29 C64 C66 C67 C70 C71 C77 C78 C82 C86 C87: library part CAP, "CC0603KRX7R9BB104"
C7 C21 C65 C69 C73 C74 C75 C76 C79 C80 C81 C83: library part CAP, "CC0603MRX5R8BB106"
C9 C10: library part CAP, "CC0603KRX5R9BB225"
C30 C31 C84 C85: library part CAP, "CC0603FRNPO9BN160"
C32 C33 C34 C35 C36 C37 C38 C39 C40 C41 C42 C43 C44 C45 C46 C47 C48 C49 C50 C51 C52 C53 C54 C55 C56 C57 C58 C59 C60 C61 C62 C63: library part CAP, "CC0402KRX7R9BB104"
C68 C72: library part CAP, "CC0603KRX7R9BB105"
D1: library part DIODE, "普通二极管"
D2: library part TVS
F1: library part FUSE
FB1 FB2: library part 磁珠_1, "PZ1608D201-1R0TF"
J1: "HR911105A HANREN"
J2 J3: "ZX-XH2.54-4PZZ"
J8: Current Rating (Max)=5A, JLCPCB Part Class="Extended Part", LCSC Part Name="DC电源插座 内径:2mm 外径:6.2mm", Manufacturer="XKB Connection(中国星坤)", Operating Temperature Range=-20℃~+70℃, Voltage Rating (Max)=24V, Add into BOM=yes, Connector Type=DC电源插座, Convert to PCB=yes, Datasheet=https://atta.szlcsc.com/upload/public/pdf/source/20211015/707A35F7AB6E89C57AAB641950105BB7.pdf, Device=DC-005-5A-2.0, Inside Contact Diameter=2mm, Manufacturer Part=DC-005-5A-2.0, Mounting Style=弯插, Outside Contact Diameter=6.2mm, Supplier=LCSC, Supplier Footprint=插件, Supplier Part=C381116, Symbol=DC-005-5A-2.0
L1: "1.2A", DC Resistance (DCR)=125mΩ, JLCPCB Part Class="Extended Part", LCSC Part Name="10uH ±20% 3.5A", Manufacturer=cjiang(长江微电), Manufacturer Part=FXL0530-100-M, Rated Current=3.2A, Saturation Current (Isat)=3.5A, Tolerance=±20%, Add into BOM=yes, Convert to PCB=yes, Datasheet=https://atta.szlcsc.com/upload/public/pdf/source/20240426/3189EA8206330E2108542F9E34E540E7.pdf, Device=FXL0530-100-M, Supplier=LCSC, Supplier Footprint=SMD,5.2x5.4mm, Supplier Part=C177248, Symbol=FXL0530-100-M, Type=一体成型电感
L2: library part FXL0420-4R7-M, "FXL0420-4R7-M", DC Resistance (DCR)=125mΩ, JLCPCB Part Class="Extended Part", LCSC Part Name="10uH ±20% 3.5A", Manufacturer=cjiang(长江微电), Manufacturer Part=FXL0530-100-M, Rated Current=3.2A, Saturation Current (Isat)=3.5A, Tolerance=±20%, Add into BOM=yes, Convert to PCB=yes, Datasheet=https://atta.szlcsc.com/upload/public/pdf/source/20240426/3189EA8206330E2108542F9E34E540E7.pdf, Device=FXL0530-100-M, Supplier=LCSC, Supplier Footprint=SMD,5.2x5.4mm, Supplier Part=C177248, Symbol=FXL0530-100-M, Type=一体成型电感
R1 R2 R3 R5 R6 R8: library part RES, "RC0603FR-074K7L"
R4: library part RES, "RC0603FR-0722RL"
R7 R21 R22: library part RES, "RC0402FR-072KL"
R9: library part RES, "RC0603FR-072K49L"
R10 R11: library part RES, "AC0603FR-0710KL"
R12 R13: library part RES, "RC0603FR-07510RL"
R14 R15 R16 R17: library part RES, "RC0402FR-0710KL"
R18 R19: library part RES, "RC0603FR-07100KL"
R20: library part RES, "RC0603FR-0722KL"
S1 S2: library part SW, "TS-1101-C-W"
U1: "High-performance foundation line, Arm Cortex-M4 core with DSP and FPU, 512 Kbytes of Flash memory, 168 MHz CPU, ART Accelerator, Ethernet, FSMC", Manufacturer_Name=STMicroelectronics, Copyright="Copyright (C) 2025 Ultra Librarian. All rights reserved.", Datasheet=https://www.st.com/resource/en/datasheet/stm32f405rg.pdf, Manufacturer_Part_Number=STM32F407ZET6, RefDes=RefDes, Type=Type
U2: "PHY"
U3: "No Description Available", Manufacturer_Name=Intel, Copyright="Copyright (C) 2025 Ultra Librarian. All rights reserved.", Manufacturer_Part_Number=EP4CE10F17C8N, RefDes=RefDes, Type=Type
U4: library part W25Q16
U5 U6: library part TPRT9013-XXGB, "No Description Available", Manufacturer_Name="Tech Public", Manufacturer_Part_Number=TPRT9013-33GB, Copyright="Copyright (C) 2025 Ultra Librarian. All rights reserved.", RefDes=RefDes, Type="Power Management"
U7: "DC/DC Converter"
X1 X2: library part DSX321G-16M, "无源晶振"

## Via types
v1: diameter 20, hole 10, TOP to BOTTOM, tented both sides, 277 vias

## Nets (pads, with @x,y where several pads share a name; then routed paths per layer and width w, separated by ;. In a path a pad name is that pad's centre, name@x,y a point inside that pad or via, vN(x,y) a via of type N, cw(c..) or ccw(c..) an arc to the next point about the centre after c; other vN are vias at no path point)
1V2: C34.2 C35.2 C36.2 C37.2 C38.2 C39.2 C40.2 C41.2 C42.2 C43.2 C71.2 C72.2 U3.D13 U3.G6 U3.G7 U3.G8 U3.G9 U3.G10 U3.H6 U3.H11 U3.K7 U3.N4 U6.5 | length 2340.2
  TOP w6: v1(882.77,-156.43) U3.D13@903.51,-177.17 ; U3.H11@982.25,-19.69 v1(1002.99,1.05) ; U3.G10@1021.62,-59.06 v1(1042.36,-79.8) ; U3.G9@1060.99,-59.06 v1(1081.73,-79.8) ; U3.G8@1100.36,-59.06 v1(1121.1,-79.8) ; v1(1118.99,38.32) U3.K7@1139.73,59.06 ; U3.G7@1139.73,-59.06 v1(1160.47,-79.8) ; U3.G6@1179.1,-59.06 v1(1199.84,-79.8) ; U3.H6@1179.1,-19.69 v1(1199.84,1.05) ; U3.N4@1257.84,177.17 v1(1278.58,156.43)
  TOP w15: v1(1738.23,374.76) C72.2@1775.74,374.76 C71.2@1775.74,315.46 U6.5@1775.74,256.15
  POWER w15: v1(882.77,-156.43) 1171.85,-156.43 1199.84,-128.44 v1(1199.84,-79.8) ; v1(1002.99,1.05) 1002.99,-40.43 v1(1042.36,-79.8) v1(1121.1,-79.8) v1(1160.47,-79.8) v1(1199.84,-79.8) ; v1(1118.99,38.32) 1197.29,38.32 1199.84,40.86 ; v1(1738.23,374.76) 1645.47,282 1329.44,282 1278.58,231.14 v1(1278.58,156.43) 1199.84,77.68 1199.84,40.86 ; v1(1199.84,-79.8) v1(1199.84,1.05) 1199.84,40.86
  BOTTOM w6: C35.2@882.77,-186.43 v1(882.77,-156.43) ; v1(1002.99,1.05) C38.2@1002.99,31.05 ; C43.2@1042.36,-109.8 v1(1042.36,-79.8) ; C42.2@1081.73,-109.8 v1(1081.73,-79.8) ; v1(1118.99,38.32) 1121.05,38.32 1129.5,29.86 1159.27,29.86 C40.2@1160.47,31.05 ; C37.2@1121.1,-109.8 v1(1121.1,-79.8) ; C36.2@1160.47,-109.8 v1(1160.47,-79.8) ; C39.2@1199.84,-109.8 v1(1199.84,-79.8) ; v1(1199.84,1.05) C41.2@1199.84,31.05 ; v1(1278.58,156.43) 1304.36,156.43 C34.2@1306.47,154.31
2V5: C32.2 C33.2 C67.2 C68.2 R7.1 R22.1 U3.F12 U3.H12 U3.L5 U5.5 XH1.1 | length 3222
  TOP w6: v1(922.14,-40.43) U3.H12@942.88,-19.69 ; U3.F12@942.88,-98.43 v1(963.62,-77.69) ; v1(1197.73,119.17) U3.L5@1218.47,98.43
  TOP w15: v1(1536.23,374.76) C68.2@1573.74,374.76 C67.2@1573.74,315.46 U5.5@1573.74,256.15
  POWER w15: v1(-116.71,-922.71) v1(178.56,-922.71) 264.56,-922.71 298.15,-889.12 324.99,-862.29 XH1.1@324.99,-805.28 324.99,-662.29 569.14,-418.14 569.14,-44.14 654.14,40.86 922.14,40.86 ; v1(963.62,-77.69) 962.66,-76.73 958.44,-76.73 v1(922.14,-40.43) 922.14,40.86 ; v1(1197.73,119.17) 1081,119.17 ; v1(1536.23,374.76) 1195.04,374.76 1081,260.72 1081,119.17 ; 922.14,40.86 1000.44,119.17 1081,119.17
  BOTTOM w6: v1(-116.71,-922.71) R22.1@-116.71,-896 ; v1(178.56,-922.71) R7.1@178.56,-896 ; C33.2@963.62,-107.69 v1(963.62,-77.69) ; v1(1197.73,119.17) C32.2@1197.73,149.17
3V3: C1.2 C2.2 C3.2 C4.2 C8.2 C11.2 C12.2 C13.2 C14.2 C15.2 C16.2 C17.2 C18.2 C19.2 C23.2 C44.2 C45.2 C46.2 C47.2 C48.2 C49.2 C50.2 C51.2 C52.2 C53.2 C54.2 C55.2 C56.2 C57.2 C58.2 C59.2 C60.2 C61.2 C62.2 C63.2 C64.2 C65.1 C66.2 C69.1 C70.2 C78.2 C79.2 C80.2 C81.2 FB1.2 FB2.2 J2.1 J3.1 J6.1 J6.3 J7.1 J7.3 L2.2 R3.1 R8.1 R10.1 R11.1 R14.1 R15.1 R16.1 R18.1 U1.6 U1.17 U1.30 U1.39 U1.52 U1.62 U1.72 U1.84 U1.95 U1.108 U1.121 U1.131 U1.144 U2.14 U3.A1 U3.A16 U3.C4 U3.C7 U3.C10 U3.C13 U3.E3 U3.E14 U3.G3 U3.G14 U3.K3 U3.K14 U3.M3 U3.M14 U3.P4 U3.P7 U3.P10 U3.P13 U3.T1 U3.T16 U4.3 U4.7 U4.8 U5.1 U5.3 U6.1 U6.3 | length 4784.8
  TOP w6: R8.1@-1001.19,729.74 -1000.22,730.71 v1(-1000.22,758.86) ; C80.2@-911.2,-556.55 -911.86,-557.21 -911.86,-578.14 -898.86,-591.14 -792.86,-591.14 -773.23,-571.51 R18.1@-773.23,-439.14 ; U2.14@-897.37,505.58 -877.59,505.58 -865.86,493.86 -838.86,493.86 -825.55,480.54 C8.2@-825.55,462.95 v1(-860.86,462.95) ; v1(-764.12,221.26) FB1.2@-764.12,251.26 ; R3.1@-762.56,367.95 v1(-732.56,367.95) ; v1(-568.86,-375.49) C16.2@-568.86,-344.49 U1.72@-496.17,-344.49 ; v1(-568.86,-116.64) C12.2@-568.86,-147.64 U1.62@-496.17,-147.64 ; v1(-568.86,80.21) C1.2@-568.86,49.21 U1.52@-496.17,49.21 ; v1(-568.86,336.12) C3.2@-568.86,305.12 U1.39@-496.17,305.12 ; C23.2@-477.34,721.75 FB2.2@-413.84,721.75 v1@-373.97,721.75 ; -383.97,721.75 v1@-383.86,721.86 ; U1.30@-304.24,418.31 -304.24,467.6 -258.7,513.14 -243.58,513.14 C19.2@-238.15,518.57 ; C19.2@-238.22,518.65 v1(-206.65,518.65) ; v1(-236.82,-491) C14.2@-205.82,-491 U1.84@-205.82,-418.31 ; v1(-87.43,518.65) C11.2@-55.86,518.65 -55.86,468.86 -48.34,461.33 U1.17@-48.34,418.31 ; v1(-20.28,-491) C13.2@10.72,-491 U1.95@10.72,-418.31 ; v1(137.2,491) C2.2@168.2,491 U1.6@168.2,418.31 ; 266.63,-445.87 266.63,-455.63 276.63,-465.63 C18.2@276.63,-491 v1(307.63,-491) ; U1.121@340.44,-108.27 C15.2@413.14,-108.27 413.14,-133.28 v1(430,-150.14) ; U1.131@340.44,88.58 C17.2@413.14,88.58 v1(413.14,119.58) ; U1.144@340.44,344.49 C4.2@413.14,344.49 v1(413.14,375.49) ; v1(764.66,-316.02) U3.A16@785.4,-295.28 ; v1(764.66,316.02) U3.T16@785.4,295.28 ; U3.E14@864.14,-137.8 v1(884.88,-117.06) ; U3.G14@864.14,-59.06 v1(884.88,-79.8) ; U3.K14@864.14,59.06 v1(884.88,79.8) ; U3.M14@864.14,137.8 v1(884.88,117.06) ; U3.C13@903.51,-216.54 v1(924.25,-195.8) ; U3.P13@903.51,216.54 v1(924.25,195.8) ; v1(1000.88,-195.8) U3.C10@1021.62,-216.54 ; v1(1000.88,195.8) U3.P10@1021.62,216.54 ; U3.C7@1139.73,-216.54 v1(1160.47,-195.8) ; U3.P7@1139.73,216.54 v1(1160.47,195.8) ; v1(1237.1,-195.8) U3.C4@1257.84,-216.54 ; v1(1237.1,195.8) U3.P4@1257.84,216.54 ; v1(1276.47,-117.06) U3.E3@1297.21,-137.8 ; v1(1276.47,-79.8) U3.G3@1297.21,-59.06 ; v1(1276.47,79.8) U3.K3@1297.21,59.06 ; v1(1276.47,117.06) U3.M3@1297.21,137.8 ; U3.A1@1375.95,-295.28 v1(1396.69,-316.02) ; U3.T1@1375.95,295.28 v1(1396.69,316.02) ; v1(1521,-73.21) C64.2@1521,-107.61 U4.8@1581.61,-107.61 U4.7@1631.61,-107.61 ; v1(1681.61,-368.39) U4.3@1681.61,-298.39
  TOP w15: v1(-949.53,-556.55) C80.2@-911.2,-556.55 ; v1(-948.86,-495.51) C79.2@-910.53,-495.51 ; v1(-948.86,-435.14) C81.2@-910.53,-435.14 ; v1(1536.23,48.95) C65.1@1573.74,48.95 C66.2@1573.74,108.26 U5.1@1573.74,167.57 1573.74,199.46 1590.14,215.86 1632.14,215.86 1648.54,199.46 U5.3@1648.54,167.57 ; v1(1738.14,48.86) 1738.23,48.95 C69.1@1775.74,48.95 C70.2@1775.74,108.26 U6.1@1775.74,167.57 1775.74,199.46 1792.14,215.86 1834.14,215.86 1850.54,199.46 U6.3@1850.54,167.57
  TOP w20: L2.2@-935.49,-310.95 -934.86,-311.58 -934.86,-350.44 C78.2@-910.53,-374.77 C81.2@-910.53,-435.14 C79.2@-910.53,-495.51 C80.2@-910.53,-555.88 C80.2@-911.2,-556.55
  BOTTOM w6: R11.1@265.13,643.86 v1(299.14,643.86) ; R10.1@265.13,800.86 v1(299.14,800.86) ; C50.2@764.66,-346.02 v1(764.66,-316.02) ; v1(764.66,316.02) C57.2@764.66,346.02 ; R14.1@806.88,1.05 806.88,34.3 852.38,79.8 v1(884.88,79.8) ; C49.2@854.88,-117.06 v1(884.88,-117.06) ; C51.2@854.88,-79.8 v1(884.88,-79.8) ; C52.2@854.88,117.06 v1(884.88,117.06) ; C54.2@924.25,-225.8 v1(924.25,-195.8) ; v1(924.25,195.8) C45.2@924.25,225.8 ; C55.2@1000.88,-225.8 v1(1000.88,-195.8) ; v1(1000.88,195.8) C48.2@1000.88,225.8 ; C62.2@1160.47,-225.8 v1(1160.47,-195.8) ; v1(1160.47,195.8) C47.2@1160.47,225.8 ; C63.2@1237.1,-225.8 v1(1237.1,-195.8) ; v1(1237.1,195.8) C60.2@1237.1,225.8 ; v1(1276.47,-117.06) C59.2@1306.47,-117.06 ; v1(1276.47,-79.8) C61.2@1306.47,-79.8 1308.97,-79.8 R16.1@1343.45,-45.31 ; v1(1276.47,79.8) C46.2@1306.47,79.8 ; v1(1276.47,117.06) C44.2@1306.47,117.06 ; R16.1@1343.47,-45.31 1350.47,-38.31 1331.47,-19.31 1331.47,17.21 1350.47,36.2 R15.1@1353.47,36.2 ; C56.2@1396.69,-346.02 v1(1396.69,-316.02) ; v1(1396.69,316.02) C58.2@1396.69,346.02
  other v1: -373.86,721.86
12V: C73.2 C74.2 C75.2 C76.2 C82.2 C83.2 L1.4 R19.1 U7.5 | length 1655.2
  TOP w15: v1(-768.86,-228.14) -768.36,-227.64 -768.36,-183.5 U7.5@-767.86,-183 C82.2@-767.86,-121.29 C83.2@-767.86,-59.58 v1(-767.86,-17.77)
  TOP w20: L1.4@-1122.67,890.97 -1121.78,891.86 -1082.86,891.86 -1075.86,884.86 -1046.39,884.86 C73.2@-1045.86,885.39 C74.2@-979.86,885.39 C76.2@-913.86,885.39 C75.2@-847.86,885.39 v1(-812.33,885.39)
  POWER w20: v1(-812.33,885.39) -812.33,792.39 -942.86,661.86 -942.86,548.86 -901.86,507.86 -901.86,417.86 -724.86,240.86 -724.86,25.23 v1(-767.86,-17.77)
  BOTTOM w6: v1(-768.86,-228.14) -736.86,-228.14 -729.86,-235.14 -729.86,-257.69 R19.1@-730.46,-258.29
A3V3: C21.1 C22.2 C86.2 FB2.1 U1.32 U1.33 | length 475.2
  TOP w6: C21.1@-418.62,605.86 -418.62,574.62 C86.2@-362.86,518.86 C86.2@-363.3,518.43 ; C21.1@-418.56,605.86 -418.56,629.04 -414.84,632.76 FB2.1@-414.84,666.75 ; C86.2@-363.38,518.34 C86.2@-363.3,518.43 ; C22.2@-300.36,518.86 -343.61,475.61 U1.32@-343.61,418.31 -343.61,388.29 -348.04,383.86 -358.86,383.86 -362.86,387.86 -362.86,417.87 U1.33@-363.3,418.31 C86.2@-363.3,518.43
EPCS_ASDO: U3.C1 U4.5 | length 438.7
  TOP w6: U3.C1@1375.95,-216.54 1687.46,-216.54 1731.61,-172.39 U4.5@1731.61,-107.61
EPCS_CLK: U3.H1 U4.6 | length 378.7
  TOP w6: U3.H1@1375.95,-19.69 1655.69,-19.69 1682,-46 1682,-107.21 U4.6@1681.61,-107.61
EPCS_CS: U3.D2 U4.1 | length 330.5
  TOP w6: U3.D2@1336.58,-177.17 1355.58,-196.17 1355.58,-228.58 1363.91,-236.91 1547.82,-236.91 1581.61,-270.7 U4.1@1581.61,-298.39
EPCS_DATA0: U3.H2 U4.2 | length 539
  TOP w6: U3.H2@1336.58,-19.69 1355.58,-38.69 1591.29,-38.69 v1(1606.61,-54) ; U4.2@1631.61,-298.39 v1(1631.61,-239.39)
  BOTTOM w6: v1(1606.61,-54) 1606.61,-214.39 v1(1631.61,-239.39)
ETH_MDC: U1.27 U2.22 | length 943.5
  TOP w6: U2.22@-1020.87,570.03 -1020.87,613.94 -1008.45,626.36 -852.29,626.36 -843.42,617.49 v1(-808.11,617.49) ; v1(-265.19,470.54) -245.19,450.54 U1.27@-245.19,418.31
  BOTTOM w6: v1(-808.11,617.49) -388.69,617.49 -265.19,493.98 v1(-265.19,470.54)
ETH_MDIO: U1.36 U2.23 | length 1266.5
  TOP w6: U2.23@-1040.56,570.03 -1040.56,613.08 -1011.77,641.86 -838.61,641.86 v1(-838.35,642.12) ; U1.36@-420.36,416.31 U1.36@-422.35,418.31 -422.81,417.85 -422.81,388.78 -379.89,345.86 -266.19,345.86 v1(-265.19,346.86)
  BOTTOM w6: v1(-838.35,642.12) -393.53,642.12 -243.86,492.46 -243.86,442.86 -265.19,421.54 -265.19,356.86
ETH_RESET: C20.1 R8.2 U1.19 U2.21 | length 1294.5
  TOP w6: v1(-1037.86,666.75) R8.2@-1001.19,666.75 C20.1@-932.86,666.75 v1(-868.59,666.75) ; U2.21@-1001.19,570.03 -1001.02,570.19 -1001.02,600.78 v1(-1000.86,600.95) ; v1@-100.71,366.13 v1@-100.34,366.49 ; v1(-100.71,366.86) -100.71,369.81 -87.71,382.81 U1.19@-87.71,418.31 U1.19@-87.66,418.35
  BOTTOM w6: v1(-1037.86,666.75) -1037.86,637.95 v1(-1000.86,600.95) ; v1(-868.59,666.75) -398.36,666.75 -227.86,496.26 -227.86,387.86 -206.86,366.86 v1(-100.71,366.86)
FB: R18.2 R20.1 U7.3 | length 172.2
  TOP w6: R18.2@-773.23,-376.15 -712.86,-376.15 -712.86,-338.14 -730.46,-320.54 U7.3@-730.46,-271.58
FPGA_25MHZ: U1.100 U3.E16 | length 811.9
  TOP w6: U1.100@109.15,-418.31 109.15,-385.13 122.14,-372.14 510.14,-372.14 744.48,-137.8 U3.E16@785.4,-137.8
FPGA_FSMC_ADDR0: U1.10 U3.L16 | length 1015.3
  TOP w6: U1.10@89.46,418.31 89.46,486.86 122.46,519.86 348.31,519.86 513.14,355.03 513.14,248.15 662.86,98.43 U3.L16@785.4,98.43
FPGA_FSMC_ADDR1: U1.11 U3.L15 | length 1084.3
  TOP w6: U1.11@69.78,418.31 69.78,486.86 114.78,531.86 353.28,531.86 525.14,360.01 525.14,253.12 659.46,118.8 804.4,118.8 U3.L15@824.77,98.43
FPGA_FSMC_ADDR2: U1.12 U3.N15 | length 1098.2
  TOP w6: U1.12@50.09,418.31 50.09,486.86 107.09,543.86 358.25,543.86 537.14,364.98 537.14,258.09 638.43,156.8 804.4,156.8 U3.N15@824.77,177.17
FPGA_FSMC_ADDR3: U1.13 U3.N16 | length 1071.6
  TOP w6: U1.13@30.41,418.31 30.41,486.86 99.41,555.86 363.23,555.86 549.14,369.95 549.14,263.06 635.04,177.17 U3.N16@785.4,177.17
FPGA_FSMC_ADDR4: U1.14 U3.P14 | length 1180.5
  TOP w6: U1.14@10.72,418.31 10.72,486.86 91.72,567.86 368.2,567.86 561.14,374.92 561.14,268.03 633.01,196.17 843.77,196.17 U3.P14@864.14,216.54
FPGA_FSMC_ADDR5: U1.15 U3.P16 | length 1114.5
  TOP w6: U1.15@-8.97,418.31 -8.97,486.86 84.03,579.86 373.17,579.86 573.14,379.89 573.14,273 629.61,216.54 U3.P16@785.4,216.54
FPGA_FSMC_ADDR6: U1.50 U3.P15 | length 1955.5
  TOP w6: U1.50@-496.17,88.58 -68.14,88.58 -28.28,128.44 v1@-28.28,268.87 ; v1(-28.65,486.86) 76.35,591.86 378.14,591.86 585.14,384.86 585.14,281.86 631.46,235.54 805.77,235.54 U3.P15@824.77,216.54
  BOTTOM w6: v1(-28.65,268.87) v1(-28.65,486.86)
FPGA_FSMC_DATA0: U1.85 U3.F16 | length 1157.8
  TOP w6: U1.85@-186.13,-418.31 -186.13,-355.41 -96.1,-265.38 v1(235.38,-265.38) ; v1(426.14,-285.8) 470.39,-285.8 657.77,-98.43 U3.F16@785.4,-98.43
  BOTTOM w6: v1(235.38,-265.38) 257.37,-265.38 277.8,-285.8 v1(426.14,-285.8)
FPGA_FSMC_DATA1: U1.86 U3.F15 | length 1176.3
  TOP w6: U1.86@-166.45,-418.31 -166.45,-355.41 -97.18,-286.14 257.03,-286.14 277.8,-265.38 v1(294.75,-265.38) ; v1(396.77,-265.38) 473.84,-265.38 659.79,-79.43 805.77,-79.43 U3.F15@824.77,-98.43
  BOTTOM w6: v1(294.75,-265.38) v1(396.77,-265.38)
FPGA_FSMC_DATA2: U1.114 U3.G16 | length 522.4
  TOP w6: U1.114@340.44,-246.06 476.19,-246.06 663.19,-59.06 U3.G16@785.4,-59.06
FPGA_FSMC_DATA3: U1.115 U3.G15 | length 569.4
  TOP w6: U1.115@340.44,-226.38 478.9,-226.38 665.22,-40.06 805.77,-40.06 U3.G15@824.77,-59.06